# Altium PCB cuk_control_pcb_grid_connected.PcbDoc (part 2 of 2)
Units mil, origin at the board's own origin, x right, y up, seen from the top; angles counter-clockwise.
Board outline 2965 x 4860 mil, 5 copper layers (Top Layer, MIddle layer1, Signal Layer 1, MIddle Layer 2, Bottom Layer), stack 37.051 mil thick; 205 components, 129 nets, 699 pads, 80 vias.
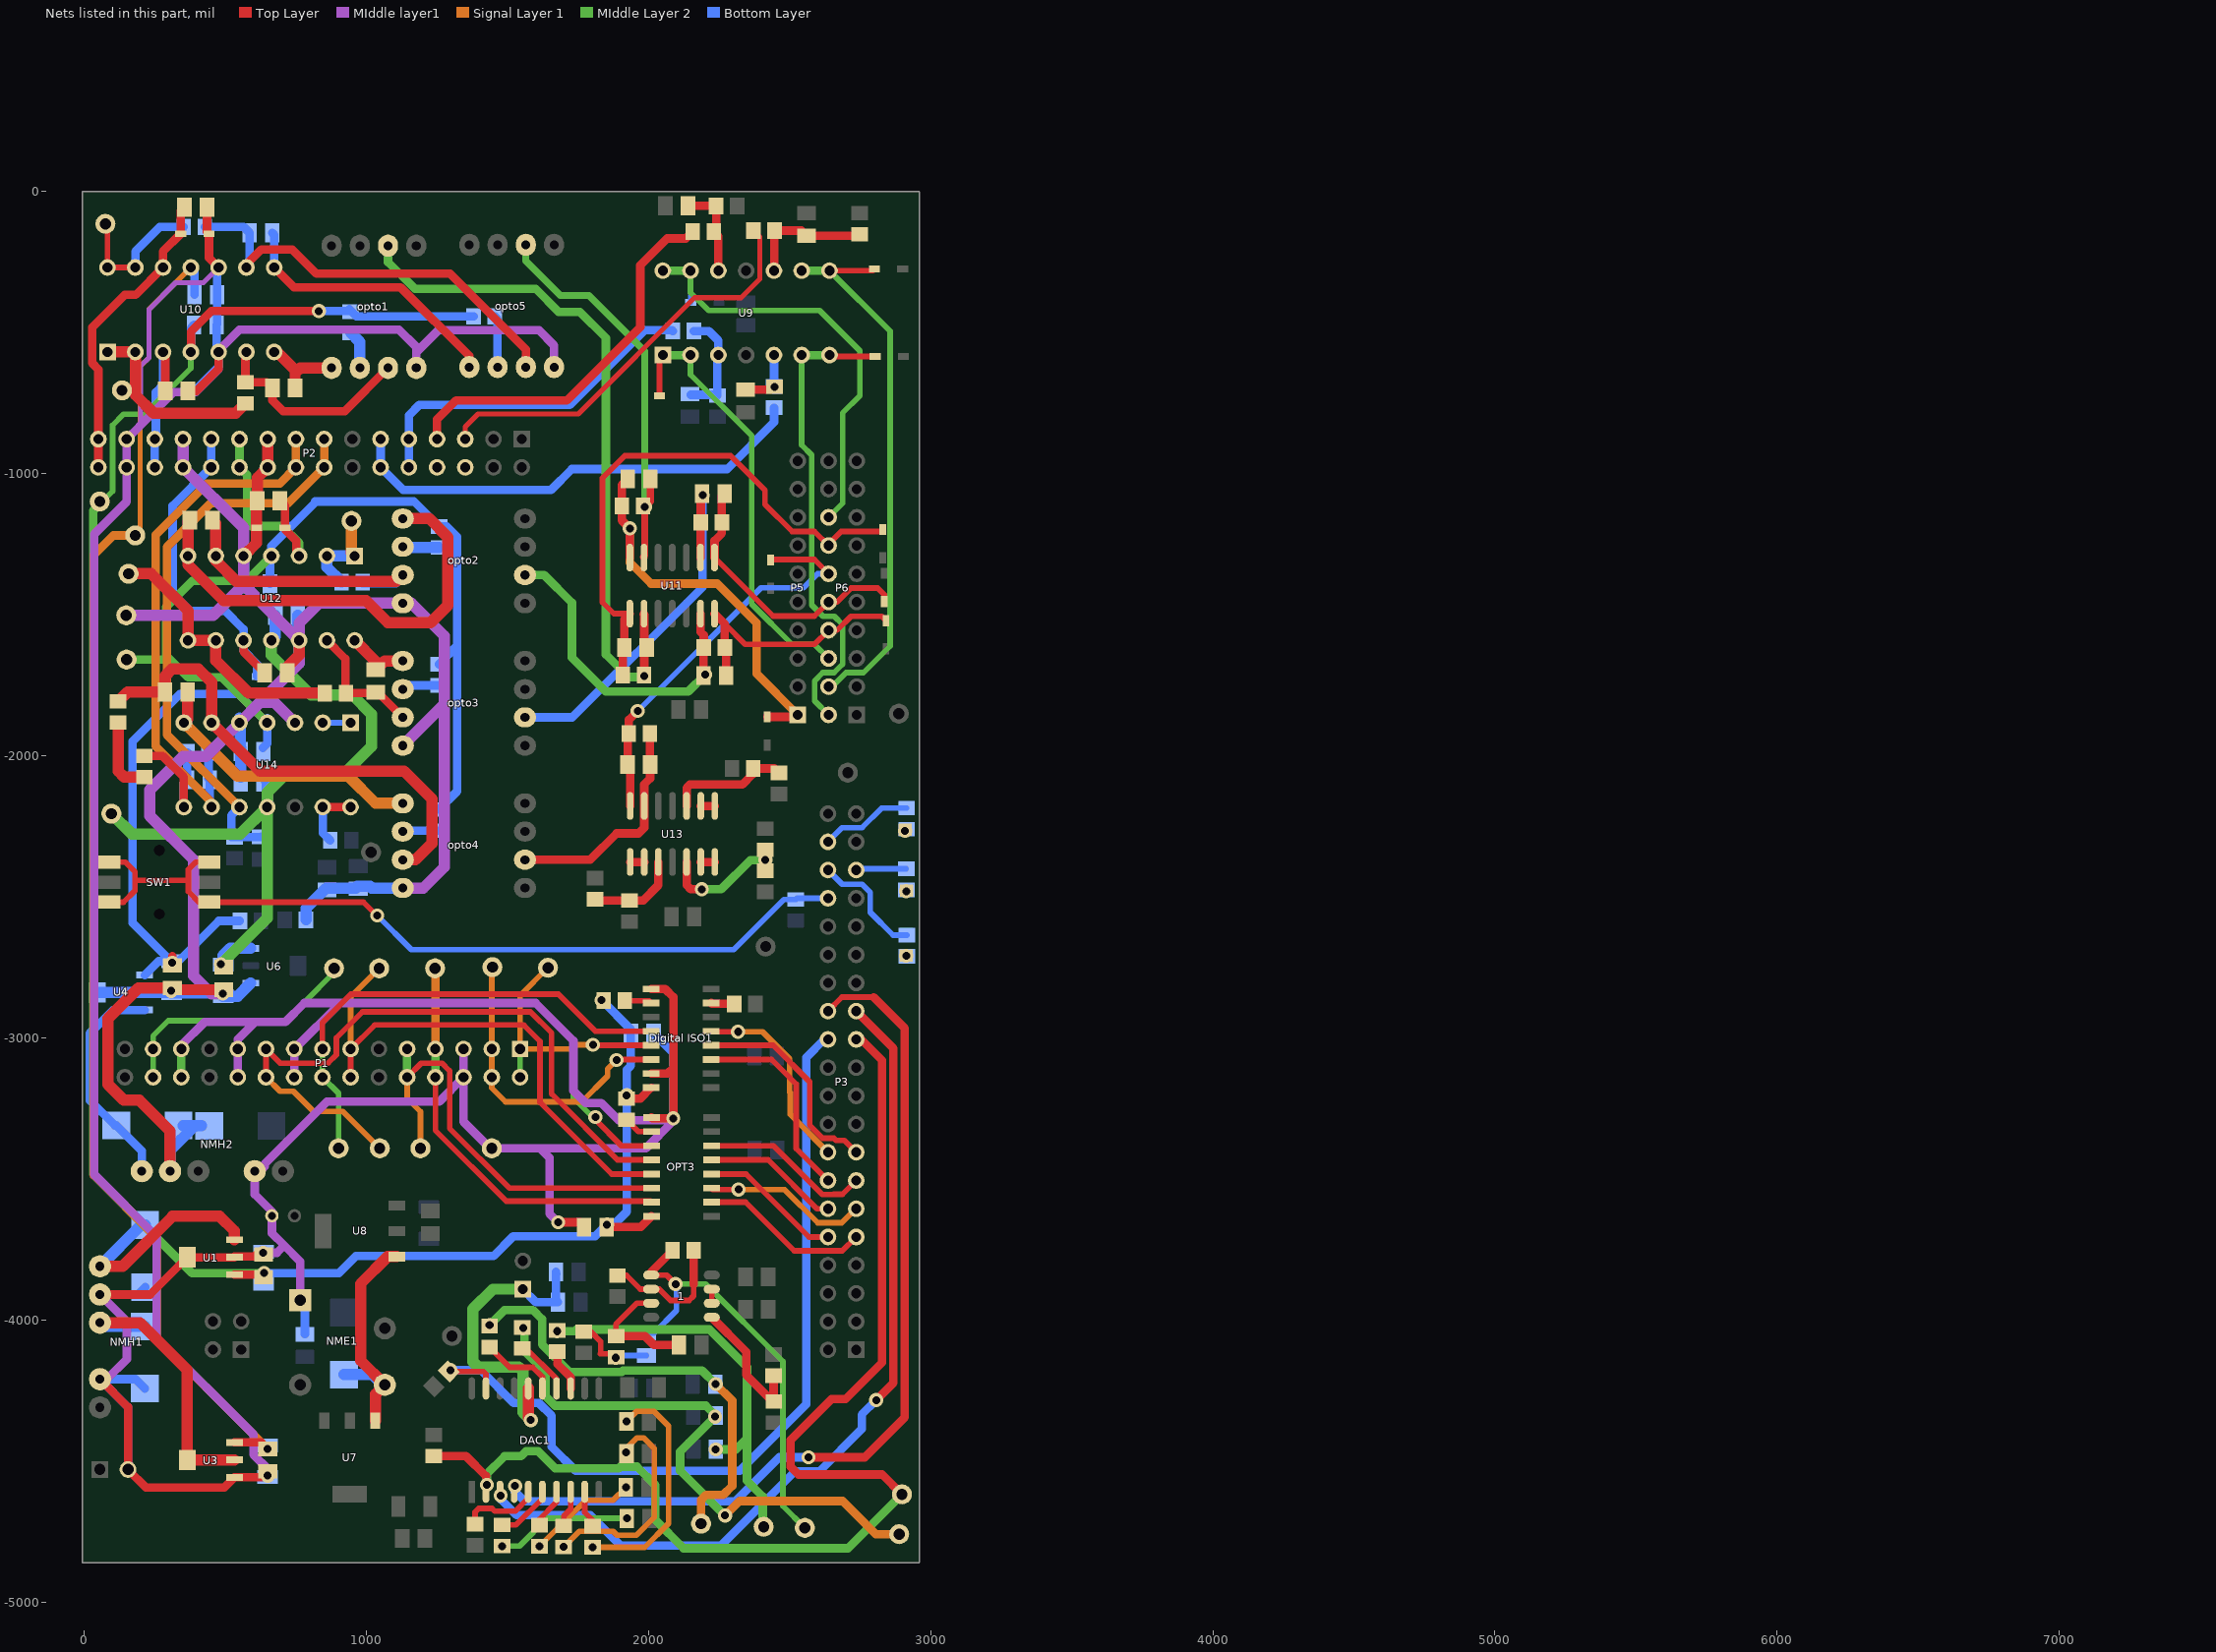
[diagram p5: the nets of this part, all layers, seen from the top]

## Via types
v1: diameter 50, hole 28, Top Layer to Bottom Layer, 80 vias

## Nets (pads, with @x,y where several pads share a name; then routed paths per layer and width w, separated by ;. In a path a pad name is that pad's centre, name@x,y a point inside that pad or via, vN(x,y) a via of type N, cw(c..) or ccw(c..) an arc to the next point about the centre after c; other vN are vias at no path point) (continued)
GND: "Digital ISO1.9" "Digital ISO1.15" C1.2 C2.2 C3.2 C4.1 C8.1 C9.2 C10.1 C15.2 C24.1 C28.2 C30.2 C39.1 C41.2 C42.1 C61.2 D5.1 D12.1 NME1.1 NMH1.2 NMH1.5 NMH2.2 OPT3.9 opto1.4 opto5.4 P1.5 P1.6 P1.17 P1.18 P1.21 P1.22 P1.25 P1.26 P2.29 P2.30 TP3.1 U1.2 U3.1 U10.5 U10.10 | length 17081.4
  Top Layer w30: NMH1.2@58,-4209 157,-4308 C2.2@157,-4529 221,-4593 498.13,-4593 U3.1@534.32,-4556.81 631.19,-4556.81 C9.2@652,-4536 ; NMH1.5@58,-3909 235,-3909 U1.2@367,-3777 U1.2@534.32,-3777 534.32,-3774.41 605.59,-3774.41 619,-3761 v1(636,-3761) ; C41.2@369,-707 400,-707 478.28,-628.72 U10.5@478.28,-569 ; C61.2@437,-56 437,-143 D12.1@444,-150 444,-235.51 U10.10@478.28,-269.79 ; v1(1681,-3653) 1756,-3653 C28.2@1773,-3670 ; 2010.7,-3126 2069,-3126 2089,-3106 ; 2010.7,-2826 2060,-2826 2089,-2855 2089,-3106 ; OPT3.9@2011.7,-3282 2014.7,-3285 v1(2089,-3285) 2089,-3106
  MIddle layer1 w18: 198,-832 202.47,-827.53 202.47,-617.53 203.1,-617.53 231.53,-589.1 231.53,-418.47 326,-324 424.06,-324 U10.10@478.28,-269.79
  MIddle layer1 w30: NMH1.5@58,-3909 153,-4004 153,-4138 82,-4209 NMH1.2@58,-4209 157,-4308 C2.2@157,-4529 ; 198,-832 P2.29@152,-878 P2.30@152,-978 152,-1100 37,-1215 37,-3483 258,-3704 258,-4061 602,-4405 602,-4476.71 652,-4526.71 v1(652,-4551) ; 202.47,-827.53 319,-711 397,-711 478.28,-629.72 U10.5@478.28,-569 478.28,-563.72 552,-490 1117,-490 1178.43,-551.43 1178.43,-570.57 ; P1.25@346,-3039 346,-3026 429,-2943 608,-2943 ; P1.22@546,-3139 P1.21@546,-3039 546,-3005 608,-2943 ; v1(636,-3761) 684.76,-3761 710.38,-3735.38 ; P1.18@746,-3139 P1.17@746,-3039 909,-2876 ; NME1.1@767,-3929 767,-3792 710.38,-3735.38 ; opto1.4@1178.43,-625.54 1178.43,-570.57 ; P1.5@1346,-3039 P1.6@1346,-3139 ; opto5.4@1666.43,-622.54 1666.43,-545.43 1613,-492 1257,-492 1178.43,-570.57 ; v1(1681,-3653) 1651,-3623 1651,-3425 1617,-3391 ; 608,-2943 715,-2943 782,-2876 909,-2876 ; 710.38,-3735.38 667,-3692 C15.2@667,-3630 667,-3615 606,-3554 NMH2.2@606,-3472 624,-3472 641.63,-3454.37 641.63,-3445.34 861.97,-3225 1260,-3225 P1.6@1346,-3139 ; 909,-2876 1601,-2876 1735,-3010 1735,-3187 1778,-3230 1833.71,-3230 1895,-3291.29 2082.71,-3291.29 v1(2089,-3285) 2089,-3294 1992,-3391 1617,-3391 ; P1.6@1346,-3139 1346,-3297 1440,-3391 TP3.1@1446,-3391 1617,-3391
  MIddle Layer 2 w30: P1.26@346,-3139 P1.25@346,-3039
  Bottom Layer w30: NMH1.2@58,-4209 184,-4209 C10.1@217,-4242 ; NMH1.5@58,-3909 192,-3909 C1.2@218,-3883 ; D5.1@371,-708 392,-708 478.28,-621.72 U10.5@478.28,-569 471,-561.72 C39.1@471,-473 473,-471 C42.1@473,-366 473,-275.06 U10.10@478.28,-269.79 ; NME1.1@767,-3937 784,-3954 C24.1@784,-4050 ; C30.2@2019,-2983 2089,-3053 v1(2089,-3285)
GND_S: C11.2 C12.2 C13.1 C18.1 C19.2 C20.1 C45.1 C47.2 C48.1 C51.2 C55.1 C60.1 C63.2 C64.2 D7.1 D9.1 NMH2.5 opto2.4 opto3.4 opto4.4 P2.19 P2.20 P2.25 P2.26 R4.1 TP21.1 U4.2 U6.1 U12.5 U12.12 U14.3 U14.5 | length 8555.9
  Top Layer w40: NMH2.5@306,-3472 306,-3329 197,-3220 142.29,-3220 86.47,-3164.18 86.47,-2930.53 194,-2823 C13.1@314,-2823 320,-2829 C19.2@496,-2829 ; U12.5@566.57,-1291.79 613,-1245.36 D7.1@613,-1192 613,-1098 C47.2@615,-1096 615,-1015 P2.20@652,-978 P2.19@652,-878 ; C51.2@721,-1706 721,-1685 763.43,-1642.57 U12.12@763.43,-1591
  MIddle layer1 w40: TP21.1@151,-1502 459.15,-1502 566.57,-1394.57 ; P2.25@352,-878 P2.26@352,-978 566.57,-1192.57 U12.5@566.57,-1291.79 566.57,-1394.57 ; v1(493,-2843) 453,-2843 390,-2780 390,-2369 234,-2213 234,-2121 353,-2002 432.51,-2002 U14.5@551.72,-1882.79 624.26,-1810.26 ; U14.3@748.57,-1882.79 676.04,-1810.26 624.26,-1810.26 ; opto4.4@1130.46,-2468.43 1203.57,-2468.43 1277,-2395 1277,-1817.39 ; opto3.4@1130.46,-1963.93 1277,-1817.39 ; 566.57,-1394.57 763,-1591 U12.12@763.43,-1591 ; 624.26,-1810.26 763.43,-1671.09 U12.12@763.43,-1591 ; U12.12@763.43,-1591 763.43,-1529.57 833.57,-1459.43 opto2.4@1130.46,-1459.43 1161.43,-1459.43 1277,-1575 1277,-1817.39
  Bottom Layer w40: U4.2@49,-2839 U4.2@216.32,-2839 309.9,-2839 C12.2@311,-2840.1 482,-2840.1 C18.1@494,-2852.1 545.39,-2852.1 U6.1@591.68,-2805.81 ; NMH2.5@306,-3472 306,-3399 393.17,-3311.83 ; C20.1@418,-3310 395,-3310 ; U14.5@552.15,-1865.79 555,-1868.64 555,-1972 556,-1973 C60.1@556,-2075 ; U12.5@566.57,-1291.79 566.57,-1377.57 C45.1@580,-1391 ; D9.1@715,-1719 763.43,-1670.57 U12.12@763.43,-1591 759,-1586.57 C48.1@759,-1502 ; R4.1@787.4,-2581 787.4,-2540.6 859.57,-2468.43 963.79,-2468.43 969.22,-2463 1014.78,-2463 1020.21,-2468.43 opto4.4@1130.46,-2468.43 ; 393.17,-3311.83 395,-3310 ; 393.17,-3311.83 353,-3310 395,-3310 ; 393.17,-3311.83 397,-3312 395,-3310
  other v1: 310,-2833
LED1: P3.35 R6.1 | length 178.8
  Bottom Layer w20: P3.35@2737,-2405 2741.4,-2400.6 R6.1@2914,-2400.6
LED2: P3.36 R7.1 | length 415.9
  Bottom Layer w20: P3.36@2637,-2405 2687.47,-2455.47 2757.52,-2455.47 2786.53,-2484.49 2786.53,-2554.53 2867.6,-2635.6 R7.1@2916.4,-2635.6
LED3: P3.38 R8.1 | length 327.9
  Bottom Layer w20: P3.38@2637,-2305 2687.47,-2254.53 2757.52,-2254.53 2826.44,-2185.6 R8.1@2915.4,-2185.6
Net1_1: 1.1 ATEST.1 Cd.1 R41.2 | length 1567.9
  Top Layer w20: 1.1@2010.72,-3840 2065,-3840 v1(2097,-3872)
  Top Layer w30: 1.1@2010.72,-3840 2010.72,-3828.69 R41.2@2086.6,-3752.81
  MIddle Layer 2 w20: v1(2097,-3872) 2203,-3872 2477,-4146 2477,-4658 ATEST.1@2555,-4736
  Bottom Layer w20: Cd.1@1994,-4045 2021,-4045 2100,-3966 2100,-3875 v1(2097,-3872)
Net1_2: 1.2 R41.1 R47.2 | length 474.6
  Top Layer w20: R47.2@1891,-3841.6 1923.6,-3841.6 1972,-3890 1.2@2010.72,-3890 2039,-3890 2079,-3930 2145,-3930 2161.4,-3913.6 2161.4,-3872.6
  Top Layer w30: 2161.4,-3872.6 R41.1@2161.4,-3752.81
Net1_3: 1.3 Cd2.1 R50.2 | length 434
  Top Layer w20: R50.2@1886,-4056.6 1886,-4014 1960,-3940 1.3@2010.72,-3940
  Top Layer w30: R50.2@1886,-4056.6 1988.6,-4056.6 2020,-4088 Cd2.1@2109,-4088
Net1_5: 1.5 3.3k.1 R51.2 | length 484.2
  Top Layer w30: 1.5@2225.28,-3990 2347,-4111.72 2347,-4194 2441.6,-4288.6 R51.2@2445,-4288.6 2444.07,-4287.67 3.3k.1@2444.07,-4196.4
Net1_6: 1.6 1.7 | length 50
  Top Layer w20: 1.6@2225.28,-3940 1.7@2225.28,-3890
NetB_1: B.1 C72.1 R43.2 | length 1448.2
  MIddle Layer 2 w30: v1(1677,-4039) 1741,-4039 1747,-4033 2217,-4033 2350,-4166 2350,-4419 ; v1(2239,-4458) 2311,-4458 2350,-4419 ; B.1@2409,-4732 2406,-4729 2406,-4625 2350,-4569 2350,-4419
NetC1_1: C1.1 NMH1.6 U1.3 | length 822.7
  Top Layer w40: NMH1.6@58,-3809 138,-3809 315,-3632 482,-3632 534.32,-3684.32 U1.3@534.32,-3715.19
  Bottom Layer w40: NMH1.6@58,-3809 204,-3663 C1.1@218,-3663
NetC10_2: C10.2 NMH1.4 U3.4 | length 1028.9
  Top Layer w40: NMH1.4@58,-4009 200,-4009 367,-4176 U3.4@367,-4495 U3.4@534.32,-4495
  Bottom Layer w40: NMH1.4@58,-4009 71,-4022 C10.2@217,-4022
NetC11_1: C11.1 NMH2.6 U4.3 | length 796.5
  Bottom Layer w30: NMH2.6@206,-3472 206,-3400 C11.1@116,-3310 111,-3310 22,-3221 22,-2983 104.19,-2900.81 U4.3@216.32,-2900.81
NetC23_1: C23.1 NME1.5 U7.1 U8.1 | length 865.7
  Top Layer w40: U7.1@1033.55,-4356 1033.55,-4262.45 NME1.5@1067,-4229 981,-4143 981,-3871 1077.45,-3774.55 U8.1@1109,-3774.55
  Bottom Layer w40: C23.1@922,-4193 1023,-4193 NME1.5@1067,-4237
NetC34_2: C34.2 R9.1 R11.2 U9.3 | length 393.1
  Bottom Layer w20: R11.2@2242.4,-721 R11.2@2245,-723.6
  Bottom Layer w30: C34.2@2150,-721 R11.2@2242.4,-721 ; R9.1@2162,-495 2215,-495 2248.57,-528.57 U9.3@2248.57,-580 2245,-583.57 R11.2@2245,-723.6
NetC35_2: C35.2 R10.1 R12.2 U9.5 | length 219.6
  Top Layer w30: C35.2@2345,-703 2436.6,-703 v1(2447,-692.6)
  Bottom Layer w30: U9.5@2445.43,-580 2446,-580.57 R10.1@2446,-691.6 v1(2447,-692.6)
NetC36_2: C36.2 R13.1 R15.2 U9.10 | length 453.6
  Top Layer w30: U9.10@2445.43,-280.79 2447.4,-278.81 R13.1@2447.4,-139 2543,-139 C36.2@2561,-157 2744.4,-157 R15.2@2749,-152.4
NetC37_2: C37.2 R14.1 R16.2 U9.12 | length 338.9
  Top Layer w30: C37.2@2141,-51 2239.6,-51 R16.2@2240.6,-52 2240.6,-134.8 R14.1@2232.4,-143 2248.57,-159.17 U9.12@2248.57,-280.79
NetC38_1: C38.1 opto1.6 R17.1 U11.2 | length 2471
  Top Layer w30: U11.2@1985,-1496.41 1983,-1498.41 1986,-1501.41 v1(1986,-1718)
  MIddle Layer 2 w30: opto1.6@1078.43,-192.46 1078.43,-250.43 1173,-345 1601,-345 1683,-427 1758,-427 1850,-519 1850,-1641 1930,-1721 1973,-1721 1986,-1708 v1(1986,-1718)
NetC38_2: C38.2 D6.2 P6.14 R17.2 U11.1 | length 1994.7
  Top Layer w20: U11.1@1935,-1496.41 1878.41,-1496.41 1838,-1456 1838,-1016 1917,-937 2292,-937 2414,-1059 2414,-1109.04 2509.96,-1205 2589,-1205 P6.14@2639,-1255 2639,-1250 2684,-1205 2824,-1205 D6.2@2831,-1198
  Top Layer w30: R17.2@1910.6,-1714 1910.6,-1620.4 C38.2@1915,-1616 1915,-1516.41 U11.1@1935,-1496.41
NetC40_1: C40.1 opto1.3 R18.2 U10.6 | length 746.3
  Top Layer w30: U10.6@576.7,-569 573,-572.7 R18.2@573,-676.6 648.6,-676.6 C40.1@669,-697 669,-741 707,-779 924.96,-779 opto1.3@1078.43,-625.54
NetC40_2: C40.2 opto1.1 U10.7 | length 301.5
  Top Layer w40: U10.7@675.13,-569 685,-569 749,-633 749,-644 ; C40.2@749,-697 749,-644 ; opto1.1@878.43,-625.54 767.46,-625.54 749,-644
NetC41_1: C41.1 D5.2 P2.27 P2.28 U10.3 | length 562.3
  Top Layer w30: U10.3@281.43,-569 289,-576.57 C41.1@289,-707
  Bottom Layer w30: P2.28@252,-978 P2.27@252,-878 256,-874 256,-712 281.43,-686.57 U10.3@281.43,-569
NetC43_1: C43.1 opto2.3 R21.2 U12.6 | length 1003.3
  Top Layer w40: C43.1@456,-1165 468.15,-1177.15 U12.6@468.15,-1291.79 468.15,-1309.15 541,-1382 1107.89,-1382 opto2.3@1130.46,-1359.43
  Bottom Layer w40: R21.2@988.4,-1384 1105.89,-1384 opto2.3@1130.46,-1359.43
NetC43_2: C43.2 opto2.1 U12.7 | length 1620.2
  Top Layer w40: C43.2@376,-1165 369.72,-1171.28 U12.7@369.72,-1291.79 369.72,-1323.72 496,-1450 1000,-1450 1078,-1528 1229,-1528 1290,-1467 1290,-1225 1224.43,-1159.43 opto2.1@1130.46,-1159.43
NetC44_1: C44.1 opto2.6 R20.1 U11.6 | length 1168.5
  Top Layer w30: U11.6@2185,-1496.41 2185,-1561 2196.6,-1572.6 R20.1@2196.6,-1616 2196,-1616.6 C44.1@2196,-1712
  MIddle Layer 2 w30: opto2.6@1563.54,-1359.43 1631.43,-1359.43 1730,-1458 1730,-1652 1850,-1772 2142,-1772 v1(2202,-1712)
NetC44_2: C44.2 D8.2 P6.8 R20.2 U11.7 | length 884.7
  Top Layer w20: 2271.4,-1532.81 2343.59,-1605 2589,-1605 P6.8@2639,-1555 2668.96,-1555 2718.48,-1505.47 2759.52,-1505.47 2760.04,-1506 2827,-1506 D8.2@2842,-1521
  Top Layer w30: U11.7@2235,-1496.41 2271.4,-1532.81 R20.2@2271.4,-1616 2276,-1620.6 C44.2@2276,-1716
NetC47_1: C47.1 D7.2 P2.21 P2.22 U12.3 | length 798.1
  Top Layer w30: C47.1@695,-1096 713,-1114 D7.2@713,-1192 713,-1198 753,-1238 753,-1281.36 U12.3@763.43,-1291.79
  MIddle Layer 2 w30: P2.21@552,-878 P2.22@552,-978 579,-1005 579,-1186 703,-1186 763.43,-1246.43 U12.3@763.43,-1291.79
NetC49_1: C49.1 opto3.3 R23.2 U12.13 | length 454.1
  Top Layer w30: U12.13@861.85,-1591 927,-1656.15 927,-1775.6 R23.2@929.4,-1778 1032,-1778 C49.1@1035,-1775 1041.54,-1775 opto3.3@1130.46,-1863.93
NetC49_2: C49.2 opto3.1 U12.14 | length 243.3
  Top Layer w40: U12.14@960.28,-1591 1035,-1665.72 C49.2@1035,-1695 1066.07,-1663.93 opto3.1@1130.46,-1663.93
NetC50_1: C50.1 opto3.6 R24.1 U11.9 | length 1366.9
  Top Layer w30: U11.9@2185,-1297.59 2185,-1174.2 R24.1@2186.2,-1173 C50.1@2186.2,-1077
  Bottom Layer w30: opto3.6@1563.54,-1863.93 1731.07,-1863.93 2193,-1402 v1(2193,-1077)
NetC50_2: C50.2 D10.2 P6.10 R24.2 U11.8 | length 1003.4
  Top Layer w20: U11.8@2235,-1297.59 2442.41,-1505 2589,-1505 P6.10@2639,-1455 2669,-1455 2689.47,-1434.53 ; 2689.47,-1434.48 2718.48,-1405.47 2812.47,-1405.47 2836,-1429 D10.2@2836,-1453
  Top Layer w30: U11.8@2235,-1297.59 2235,-1238 2261,-1212 R24.2@2261,-1173 2261,-1081 C50.2@2271,-1071
NetC51_1: C51.1 D9.2 P2.23 P2.24 U12.10 | length 1239.9
  Top Layer w30: U12.10@566.57,-1591 566.57,-1631.57 C51.1@641,-1706
  Bottom Layer w30: P2.23@452,-878 P2.24@452,-978 315.2,-1114.8 315.2,-1423.2 378,-1486 501,-1486 566.5,-1551.5 566.57,-1551.43 U12.10@566.57,-1591 566.57,-1627.57 615,-1676 D9.2@615,-1719
NetC52_1: C52.1 P2.17 P2.18 R27.2 U14.9 | length 1924.8
  Signal Layer 1 w30: U14.9@453.72,-2165 255,-1966.28 255,-1217 437,-1035 695,-1035 P2.18@752,-978 P2.17@752,-878
  Bottom Layer w30: R27.2@442.4,-1988 442.4,-2080.4 C52.1@447,-2085 447,-2175.7 U14.9@453.3,-2182
NetC52_2: C52.2 R27.1 R30.2 U14.8 | length 476.5
  Top Layer w30: R30.2@215,-2000.6 279.6,-2000.6 354.87,-2075.87 U14.8@354.87,-2182
  Bottom Layer w30: U14.8@354.87,-2182 354.87,-2097.13 C52.2@367,-2085 367,-1988.6 R27.1@367.6,-1988
NetC53_1: C53.1 opto4.6 R26.1 U13.13 | length 811.4
  Top Layer w30: opto4.6@1563.54,-2368.43 1794.57,-2368.43 1888,-2275 1966,-2275 1986,-2255 U13.13@1986,-2177.59 1986,-2101 2007,-2080 C53.1@2007,-2031 2006.4,-2030.4 R26.1@2006.4,-1922
NetC53_2: C53.2 D11.2 P6.12 R26.2 U13.14 | length 1463
  Top Layer w20: D11.2@2435,-1299 2435,-1304.53 2588.53,-1304.53 P6.12@2639,-1355
  Top Layer w30: U13.14@1936,-2177.59 1936,-2040 C53.2@1927,-2031 1927,-1926.6 R26.2@1931.6,-1922 1931.6,-1872.4 v1(1963,-1841)
  Bottom Layer w20: v1(1963,-1841) 2399.47,-1404.53 2550.52,-1404.53 2600.04,-1355 P6.12@2639,-1355
NetC54_1: C54.1 opto4.3 R28.2 U14.6 | length 1751.6
  Top Layer w40: R28.2@122,-1807.6 155.6,-1774 C54.1@288,-1774 288,-1718 313,-1693 407,-1693 453.3,-1739.3 U14.6@453.3,-1882.79 624.51,-2054 1135,-2054 1234,-2153 1234,-2310 1175.57,-2368.43 opto4.3@1130.46,-2368.43
NetC54_2: C54.2 opto4.1 U14.7 | length 1008.1
  Top Layer w40: U14.7@354.87,-1882.79 368,-1869.66 C54.2@368,-1774
  Signal Layer 1 w40: U14.7@354.87,-1882.79 544.09,-2072 938,-2072 1034.43,-2168.43 opto4.1@1130.46,-2168.43
NetC57_1: C57.1 P2.15 P2.16 R31.2 U14.10 | length 2028.3
  Signal Layer 1 w30: U14.10@551.72,-2182 295,-1925.28 295,-1260 450,-1105 725,-1105 P2.16@852,-978 P2.15@852,-878
  Bottom Layer w30: U14.10@551.72,-2182 523,-2210.72 523,-2288.6 R31.2@535,-2288.6 628.4,-2288.6 C57.1@630,-2287
NetC58_1: C58.1 opto5.6 R32.1 U11.13 | length 1452.1
  Top Layer w25: U11.13@1985,-1297.59 1983,-1295.59 1988,-1290.59 v1(1988,-1118) 2008,-1098 C58.1@2008,-1019
  MIddle Layer 2 w25: opto5.6@1566.43,-189.46 1566.43,-246.43 1689,-369 1790,-369 1988,-567 v1(1988,-1118)
NetC58_2: C58.2 D13.2 P5.1 R32.2 U11.14 | length 1454.9
  Top Layer w30: C58.2@1928,-1019 1907,-1040 R32.2@1907,-1114 1907,-1166 v1(1935,-1194) U11.14@1935,-1297.59 ; D13.2@2422,-1862 2523,-1862 P5.1@2530,-1855
  Signal Layer 1 w30: v1(1935,-1194) 1935,-1315 2010,-1390 2245,-1390 2384,-1529 2384,-1709 P5.1@2530,-1855
NetC59_1: C59.1 opto5.3 R33.2 U10.9 | length 1527.1
  Top Layer w30: U10.9@576.7,-269.79 576.7,-258.3 629,-206 739,-206 825,-292 1299,-292 1566.43,-559.43 opto5.3@1566.43,-622.54
  Bottom Layer w30: R33.2@429.4,-126 567,-126 C59.1@588,-147 588,-258.49 U10.9@576.7,-269.79
NetC59_2: C59.2 opto5.1 U10.8 | length 986.1
  Top Layer w30: U10.8@675.13,-269.79 745.34,-340 1123,-340 1366.43,-583.43 opto5.1@1366.43,-622.54
  Bottom Layer w30: C59.2@668,-147 675.13,-154.13 U10.8@675.13,-269.79
NetC61_1: C61.1 D12.2 P2.31 P2.32 U10.12 | length 1089.5
  Top Layer w30: P2.32@52,-978 P2.31@52,-878 52,-630.84 30.05,-608.88 30.05,-481.95 145,-367 184.21,-367 U10.12@281.43,-269.79 281.43,-212.57 D12.2@344,-150 344,-69 C61.1@357,-56
NetC67_1: C67.1 D.1 R39.2 | length 1589.5
  MIddle Layer 2 w30: v1(1438,-4017) 1491,-3964 1592,-3964 1624,-3996 1624,-4086 1721,-4183 1905.71,-4183 1910.71,-4178 2191,-4178 v1(2239,-4226)
  Signal Layer 1 w30: D.1@2187,-4721 2187,-4637 2205,-4619 2266,-4619 2298,-4587 2298,-4285 v1(2239,-4226)
NetC68_1: C68.1 C69.1 DAC1.16 P7.1 | length 1146.8
  Top Layer w40: DAC1.16@1575.13,-4241.86 1575.13,-4345.13 v1(1584,-4354)
  MIddle Layer 2 w40: P7.1@1556,-3890 1450,-3890 1379,-3961 1379,-4147 1398,-4166 1541,-4166 1556,-4181 1556,-4326 v1(1584,-4354)
  Bottom Layer w20: C68.1@1673,-3829 C68.1@1680,-3836
  Bottom Layer w30: P7.1@1556,-3890 1602,-3936 C69.1@1680,-3936 1673,-3929 C68.1@1673,-3829
NetC71_1: C71.1 R38.1 | length 483.8
  MIddle Layer 2 w20: v1(1482,-4800.4) 1544.6,-4800.4 1643,-4702 v1(1925,-4702)
NetC73_1: C73.1 R40.1 | length 392.7
  Signal Layer 1 w20: v1(1615,-4801.4) 1778.4,-4638 1875,-4638 v1(1921,-4592)
NetC74_1: C74.1 R42.2 | length 764.7
  Signal Layer 1 w20: v1(1701,-4803.4) 1756.4,-4748 1875,-4748 1889,-4762 1958,-4762 2022,-4698 2022,-4455 1984,-4417 1960,-4417 1922,-4455 v1(1922,-4469)
NetC75_1: C75.1 R44.2 | length 834.4
  Signal Layer 1 w20: v1(1803,-4804.4) 1987.6,-4804.4 2072,-4720 2072,-4375 2020,-4323 1959,-4323 v1(1923,-4359)
NetCc_1: Cc.1 CTESTIN.1 Rc.2 | length 2062.3
  MIddle Layer 2 w30: v1(1557,-4028) 1562,-4033 1562,-4109 1637,-4184 1637,-4270 1670,-4303 2204,-4303 2237,-4336 v1(2237,-4342) 2113,-4466 2113,-4533 v1(2272,-4692)
  Signal Layer 1 w30: v1(2272,-4692) 2323,-4641 2689,-4641 2806,-4758 CTESTIN.1@2889,-4758
NetCd_2: Cd.2 R49.2 R50.1 | length 295.8
  Top Layer w20: R49.2@1771,-4040.6 1796.6,-4040.6 1832,-4076 1832,-4117 1830,-4119 1873.6,-4119 R50.1@1886,-4131.4 R50.1@1886,-4128.53
  Bottom Layer w20: v1(1885,-4133) 1893,-4125 Cd.2@1994,-4125
NetD1_2: D1.2 P6.6 U9.1 U9.2 | length 1571.1
  Top Layer w20: D1.2@2040,-724 2040,-591.72 U9.1@2051.72,-580
  MIddle Layer 2 w20: U9.2@2150.15,-580 2150.15,-649.15 2367,-866 2367,-1462.04 2510.43,-1605.47 2589.47,-1605.47 P6.6@2639,-1655
  MIddle Layer 2 w30: U9.1@2051.72,-580 U9.2@2150.15,-580
NetD2_2: D2.2 P6.2 U9.6 U9.7 | length 1713.7
  Top Layer w20: U9.7@2642.28,-580 2647.28,-585 D2.2@2804,-585
  MIddle Layer 2 w20: U9.6@2543.85,-580 2543.85,-898.81 2579.53,-934.48 2579.53,-1465.57 2619.43,-1505.47 2659.52,-1505.47 2688.53,-1534.49 2688.53,-1675.51 2658.57,-1705.47 2618.48,-1705.47 2589.47,-1734.49 2589.47,-1805.47 P6.2@2639,-1855 P6.2@2639,-1847
  MIddle Layer 2 w30: U9.6@2543.85,-580 U9.7@2642.28,-580
NetD3_2: D3.2 P6.4 U9.8 U9.9 | length 1956.3
  Top Layer w20: U9.8@2642.28,-280.79 2795.21,-280.79 D3.2@2801,-275
  MIddle Layer 2 w20: P6.4@2639,-1755 2651.47,-1755 2701,-1705.47 2762.53,-1705.47 2857,-1611 2857,-495.51 U9.8@2642.28,-280.79
  MIddle Layer 2 w30: U9.9@2543.85,-280.79 U9.8@2642.28,-280.79
NetD4_2: D4.2 P6.16 U9.13 U9.14 | length 1609.9
  MIddle Layer 2 w20: U9.13@2150.15,-280.79 2150.15,-358.15 2214,-422 2607,-422 2750,-565 2750,-724 2688.53,-785.47 2688.53,-1105.47 P6.16@2639,-1155
  MIddle Layer 2 w30: U9.14@2051.72,-280.79 U9.13@2150.15,-280.79
  Bottom Layer w20: U9.13@2150.15,-280.79 2151,-281.64 D4.2@2151,-393
NetDAC1_2: DAC1.2 P3.23 R1.1 TP26.1 | length 4225.5
  Top Layer w30: R1.1@1240,-4481.4 1354.4,-4481.4 1425.13,-4552.13 ; P3.23@2737,-3005 2754,-3005 2829,-3080 2829,-4150 2699,-4280 2649,-4280 2504,-4425 2504,-4519 2532,-4547 2829,-4547 TP26.1@2899,-4617
  MIddle Layer 2 w30: v1(1428.32,-4583.41) 1428.32,-4551.32 1425,-4548 1491,-4482 1549.71,-4482 1567.71,-4464 1609.71,-4464 1670.71,-4525 1895.29,-4525 1901.29,-4519 1960,-4519 2025,-4584 2025,-4708 2125,-4808 2708,-4808 TP26.1@2899,-4617
  Bottom Layer w30: v1@1425,-4586.73 v1(1428.32,-4583.41)
NetDAC1_4: DAC1.4 P3.26 | length 3255.7
  Top Layer w20: P3.26@2637,-2905 2686.53,-2855.47 2798.47,-2855.47
  Top Layer w30: v1(2568,-4486) 2767,-4486 2909,-4344 2909,-2966 2798.47,-2855.47
  Bottom Layer w30: v1(1528.32,-4587.47) 1528.32,-4604.68 1527,-4606 1563,-4642 2308,-4642 2464,-4486 v1(2568,-4486)
NetDAC1_5: DAC1.5 R37.2 | length 281.7
  Top Layer w20: R37.2@1387,-4722.6 1387,-4680 1399.63,-4667.37 1446.73,-4667.37 1456.36,-4677 1528.68,-4677 1575.13,-4630.55 DAC1.5@1575.13,-4608
NetDAC1_6: DAC1.6 R38.2 | length 205.8
  Top Layer w20: R38.2@1482,-4725.6 1531.4,-4725.6 1625.13,-4631.87 DAC1.6@1625.13,-4608
NetDAC1_7: DAC1.7 R40.2 | length 154.1
  Top Layer w20: R40.2@1597,-4725.6 R40.2@1597,-4715 ; R40.2@1615,-4726.6 1615,-4705 1675.13,-4644.87 DAC1.7@1675.13,-4608
NetDAC1_8: DAC1.8 R42.1 | length 130.6
  Top Layer w20: R42.1@1701,-4728.6 1701,-4694 1725.13,-4669.87 DAC1.8@1725.13,-4608
NetDAC1_9: DAC1.9 R44.1 | length 133.1
  Top Layer w20: DAC1.9@1775.13,-4608 1775.13,-4681.13 1803,-4709 R44.1@1803,-4729.6
NetDAC1_13: DAC1.13 R43.1 | length 150
  Top Layer w30: R43.1@1678,-4111.4 1678,-4155 1725.13,-4202.13 DAC1.13@1725.13,-4241.86
NetDAC1_14: DAC1.14 Rc.1 | length 192.9
  Top Layer w20: Rc.1@1563,-4095.4 1675.13,-4207.53 DAC1.14@1675.13,-4241.86
NetDAC1_15: DAC1.15 R39.1 | length 271.7
  Top Layer w20: R39.1@1438,-4095.4 1509.6,-4167 1591,-4167 1625.13,-4201.13 DAC1.15@1625.13,-4241.86
NetDAC1_19: DAC1.19 P3.24 R3.1 | length 3085.8
  Top Layer w20: R3.1@1299,-4181.55 1416.55,-4181.55 1425.13,-4190.13 DAC1.19@1425.13,-4241.86
  Bottom Layer w30: v1(1299,-4177) 1300,-4176 1406,-4176 1523,-4293 1612,-4293 1658,-4339 1658,-4449 1743,-4534 2324,-4534 2560,-4298 2560,-3069 2624,-3005 P3.24@2637,-3005
"NetDigital ISO1_3": "Digital ISO1.3" P3.14 | length 725.5
  Top Layer w20: 2223.3,-3076 2437,-3076 2524,-3163 2524,-3392 P3.14@2637,-3505
"NetDigital ISO1_4": "Digital ISO1.4" P3.15 | length 760.9
  Top Layer w20: 2223.3,-3026 2442,-3026 2572,-3156 2572,-3310.04 2617.43,-3355.47 2657.52,-3355.47 2665.04,-3363 2695,-3363 P3.15@2737,-3405
"NetDigital ISO1_5": "Digital ISO1.5" P3.16 | length 705.6
  Top Layer w20: 2223.3,-2976 2225.3,-2978 v1(2318,-2978)
  Signal Layer 1 w20: v1(2318,-2978) 2405,-2978 2501,-3074 2501,-3192.36 2503,-3194.36 2503,-3271 P3.16@2637,-3405
"NetDigital ISO1_7": "Digital ISO1.7" R45.2 | length 82.5
  Top Layer w30: 2223.3,-2876 2226.3,-2879 R45.2@2304.6,-2879
"NetDigital ISO1_10": "Digital ISO1.10" R46.1 | length 96.6
  Top Layer w20: R46.1@1917.4,-2868 2002.7,-2868 2010.7,-2876
"NetDigital ISO1_12": "Digital ISO1.12" P1.15 P1.16 TP9.1 | length 1729.4
  Top Layer w20: P1.15@846,-3039 846,-2946 947,-2845 1682,-2845 1813,-2976 2010.7,-2976
  MIddle Layer 2 w20: P1.15@846,-3039 P1.16@846,-3139 903,-3196 TP9.1@903,-3391
"NetDigital ISO1_13": "Digital ISO1.13" P1.1 P1.2 TP7.1 | length 900.7
  Top Layer w20: v1(1804,-3024) 1806,-3026 2010.7,-3026
  MIddle Layer 2 w20: P1.2@1546,-3139 P1.1@1546,-3039
  Signal Layer 1 w20: TP7.1@1645,-2751 1546,-2850 P1.1@1546,-3039 1729,-3039 1744,-3024 v1(1804,-3024)
"NetDigital ISO1_14": "Digital ISO1.14" P1.3 P1.4 TP5.1 | length 1090.6
  Top Layer w20: v1(1888,-3078) 1890,-3076 2010.7,-3076
  Signal Layer 1 w20: TP5.1@1448,-2749 1446,-2751 P1.3@1446,-3039 P1.4@1446,-3139 1446,-3177 1495,-3226 1765,-3226 1856,-3135 1856,-3110 v1(1888,-3078)
NetLED1_1: LED1.1 R6.2 | length 10
  Top Layer w20: v1(2913.98,-2480) LED1.1@2915.4,-2478.58
  Bottom Layer w20: R6.2@2906,-2480 v1(2913.98,-2480)
NetLED2_1: LED2.1 R7.2
  other v1: 2914,-2708.58
NetLED3_1: LED3.1 R8.2 | length 20.7
  Top Layer w20: LED3.1@2897,-2266 v1(2909.8,-2266)
  Bottom Layer w20: v1(2909.8,-2266) R8.2@2915.4,-2260.4
NetOPT3_2: OPT3.2 P3.9 | length 604.7
  Top Layer w20: OPT3.2@2224.3,-3582 2345,-3582 2517.53,-3754.53 2687.47,-3754.53 P3.9@2737,-3705
NetOPT3_3: OPT3.3 P3.11 | length 584
  Top Layer w20: OPT3.3@2224.3,-3532 2229.3,-3537 v1(2320,-3537)
  Signal Layer 1 w20: v1(2320,-3537) 2483,-3537 2600.53,-3654.53 2685.47,-3654.53 2735,-3605 P3.11@2737,-3605
NetOPT3_4: OPT3.4 P3.10 | length 505.1
  Top Layer w20: OPT3.4@2224.3,-3482 2347,-3482 2570,-3705 P3.10@2637,-3705
NetOPT3_5: OPT3.5 P3.12 | length 484.4
  Top Layer w20: OPT3.5@2224.3,-3432 2425,-3432 2598,-3605 P3.12@2637,-3605
NetOPT3_6: OPT3.6 P3.13 | length 604.7
  Top Layer w20: OPT3.6@2224.3,-3382 2443.96,-3382 2616.48,-3554.53 2657.52,-3554.53 2658.04,-3554 2688,-3554 P3.13@2737,-3505
NetOPT3_10: OPT3.10 R36.2 | length 106.3
  Top Layer w20: R36.2@1923,-3289.4 1965.6,-3332 OPT3.10@2011.7,-3332
NetOPT3_11: OPT3.11 P1.27 P1.28 TP2.1 | length 2460.5
  Top Layer w20: v1(1813,-3280) 1813,-3290 1905,-3382 OPT3.11@2011.7,-3382
  MIddle Layer 2 w20: P1.28@246,-3139 P1.27@246,-3039 246,-2993 300,-2939 716,-2939 781,-2874 ; TP2.1@887,-2753 887,-2768 781,-2874 ; v1(1813,-3280) 1803,-3280 1735,-3212 1735,-3010 1599,-2874 781,-2874
NetOPT3_12: OPT3.12 P1.19 P1.20 TP18.1 | length 2448.7
  Top Layer w20: P1.20@646,-3139 P1.19@646,-3039 696,-3089 866.04,-3089 895.53,-3059.51 895.53,-2999.47 988,-2907 1583,-2907 1658,-2982 1658,-3198.64 1891.36,-3432 OPT3.12@2011.7,-3432
  Signal Layer 1 w20: P1.20@646,-3139 695.53,-3188.53 742.95,-3188.53 814.43,-3260 918,-3260 TP18.1@1049,-3391
NetOPT3_13: OPT3.13 P1.13 P1.14 TP17.1 | length 1874
  Top Layer w20: P1.14@946,-3139 P1.13@946,-3039 1031,-2954 1559,-2954 1617,-3012 1617,-3228 1871,-3482 OPT3.13@2011.7,-3482
  Signal Layer 1 w20: P1.13@946,-3039 946,-2854 TP17.1@1047,-2753
NetOPT3_14: OPT3.14 P1.9 P1.10 TP14.1 | length 1572.1
  Top Layer w20: P1.10@1158,-3139 P1.10@1146,-3139 1195.53,-3089.47 1269.42,-3089.47 1296.47,-3116.53 1296.47,-3319.87 1508.61,-3532 OPT3.14@2011.7,-3532
  MIddle Layer 2 w30: P1.10@1146,-3139 P1.9@1146,-3039
  Signal Layer 1 w20: P1.10@1146,-3139 1146,-3214 1193,-3261 TP14.1@1193,-3391
NetOPT3_15: OPT3.15 P1.7 P1.8 TP13.1 | length 1445.7
  Top Layer w20: P1.8@1246,-3139 1246,-3327 1497,-3578 2007.7,-3578 OPT3.15@2011.7,-3582
  MIddle Layer 2 w30: P1.8@1246,-3139 P1.7@1246,-3039
  Signal Layer 1 w30: TP13.1@1245,-2753 1246,-2754 P1.7@1246,-3039
Netopto1_2: opto1.2 R19.2 | length 137.6
  Bottom Layer w40: R19.2@946,-501.4 978.43,-533.83 opto1.2@978.43,-625.54
Netopto2_2: opto2.2 R22.2 | length 129.8
  Bottom Layer w40: opto2.2@1130.46,-1259.43 1133.44,-1262.4 R22.2@1259,-1262.4
Netopto3_2: opto3.2 R25.2 | length 133.1
  Bottom Layer w30: opto3.2@1130.46,-1763.93 1143.99,-1750.4 R25.2@1258,-1750.4
Netopto4_2: opto4.2 R29.2 | length 128.8
  Bottom Layer w30: opto4.2@1130.46,-2268.43 1133.49,-2265.4 R29.2@1258,-2265.4
Netopto5_2: opto5.2 R34.2 | length 183.7
  Bottom Layer w30: R34.2@1456.4,-443 1466.43,-453.02 opto5.2@1466.43,-622.54
NetP2_5: P2.5 R13.2 | length 1485.3
  Top Layer w18: P2.5@1352,-878 1352,-834 1397,-789 1752,-789 2164,-377 2329,-377 2395.53,-310.47 2395.53,-161.93 R13.2@2372.6,-139
NetP2_6: P2.6
NetP2_7: P2.7 R14.2 | length 1379.3
  Top Layer w30: P2.7@1252,-878 1252,-808 1319,-741 1712,-741 1972,-481 1972,-262 2067,-167 2133.6,-167 R14.2@2157.6,-143
NetP2_8: P2.8
NetP2_9: P2.9 P2.10 R9.2 | length 1245.5
  Bottom Layer w30: P2.10@1152,-978 P2.9@1152,-878 1152,-794 1189,-757 1722,-757 1987,-492 2084.2,-492 R9.2@2087.2,-495
NetP2_11: P2.11 P2.12 R10.2 | length 1678.1
  Bottom Layer w30: P2.11@1052,-878 P2.12@1052,-978 1132,-1058 1656,-1058 1730,-984 2280,-984 2446,-818 R10.2@2446,-766.4
NetR18_1: R18.1 TP19.1 U10.1 U10.2 | length 731.2
  Top Layer w40: U10.1@84.57,-569 U10.2@183,-569 183,-699 ; TP19.1@136,-705 177,-705 183,-699 ; R18.1@573,-751.4 538.4,-786 248,-786 183,-721 183,-699
NetR21_1: R21.1 TP20.1 U12.1 U12.2 | length 340.5
  Signal Layer 1 w40: TP20.1@949,-1168 949,-1280.51 U12.1@960.28,-1291.79
  Bottom Layer w40: R21.1@913.6,-1384 861.85,-1332.25 U12.2@861.85,-1291.79 U12.1@960.28,-1291.79
NetR23_1: R23.1 TP22.1 U12.8 U12.9 | length 974.2
  Top Layer w40: TP22.1@159,-1355 239,-1355 369.72,-1485.72 U12.8@369.72,-1591 U12.9@468.15,-1591 468.15,-1662.15 584,-1778 R23.1@854.6,-1778
NetR28_1: R28.1 R30.1 | length 273.5
  Top Layer w40: R28.1@122,-1882.4 122,-2054 143.4,-2075.4 R30.1@215,-2075.4
NetR33_1: R33.1 TP23.1 U10.13 U10.14 | length 520.8
  Top Layer w20: TP23.1@77,-115 84.57,-122.57 U10.14@84.57,-269.79 U10.13@183,-269.79
  Bottom Layer w30: U10.13@183,-269.79 183,-213 270,-126 R33.1@354.6,-126
NetR35_2: R35.2 U14.13 U14.14 | length 227.4
  Top Layer w30: U14.13@847,-2182 U14.14@945.43,-2182
  Bottom Layer w30: U14.13@847,-2182 847,-2273.4 R35.2@873.6,-2300
NetRx1_1: Rx1.1 Rx2.2 U13.5 | length 409.9
  Top Layer w30: U13.5@2136,-2376.41 2136,-2458 2151,-2473 v1(2190,-2473)
  MIddle Layer 2 w30: v1(2190,-2473) 2259,-2473 2362,-2370 2414,-2370 v1(2415,-2369)
NetRx3_1: Rx3.1 Rx4.2 U13.3 | length 331.5
  Top Layer w30: Rx3.1@1811,-2508.4 1815.2,-2512.6 Rx4.2@1933,-2512.6 1982.4,-2512.6 2036,-2459 U13.3@2036,-2376.41
NetRx5_1: Rx5.1 Rx6.2 U13.10 | length 437.4
  Top Layer w30: U13.10@2136,-2177.59 2136,-2113.57 2147.57,-2102 2334,-2102 2371.4,-2064.6 Rx5.1@2371.4,-2045 2447.47,-2045 Rx6.2@2463.07,-2060.6
NetU13_1: U13.1 U13.2 | length 50
  Top Layer w30: U13.1@1936,-2376.41 U13.2@1986,-2376.41
NetU13_6: U13.6 U13.7 | length 50
  Top Layer w30: U13.6@2186,-2376.41 U13.7@2236,-2376.41
NetU13_8: U13.8 U13.9 | length 50
  Top Layer w30: U13.9@2186,-2177.59 U13.8@2236,-2177.59
NetU14_1: U14.1 U14.2 | length 98.4
  Bottom Layer w20: U14.2@847,-1882.79 U14.1@945.43,-1882.79
P5V: "Digital ISO1.16" C3.1 C4.2 C28.1 C30.1 C39.2 OPT3.16 R19.1 R34.1 R36.1 R46.2 TP1.1 U1.1 U10.4 | length 7605.9
  Top Layer w30: U10.4@379.85,-569 379.85,-497.15 453,-424 v1(833,-424) ; U1.1@534.32,-3838.81 C4.2@628.81,-3838.81 ; C28.1@1865,-3670 1973.7,-3670 OPT3.16@2011.7,-3632 ; R36.1@1924,-3214.6 1972.1,-3214.6 2010.7,-3176
  MIddle Layer 2 w20: TP1.1@57,-1108 102.47,-1062.53 102.47,-828.47 141,-789.94 217.06,-789.94 379.85,-627.15 U10.4@379.85,-569
  MIddle Layer 2 w30: TP1.1@57,-1108 34,-1131 34,-3483 384,-3833 v1(639,-3833)
  Bottom Layer w30: U10.4@379.85,-569 379.85,-484.15 C39.2@391,-473 ; v1(639,-3833) 904,-3833 964,-3773 1452,-3773 1522,-3703 1812,-3703 v1(1854,-3661) 1879,-3661 1924,-3616 v1(1924,-3203) 1924,-3112.71 1938,-3098.71 1938,-2969 v1(1835,-2866) ; v1(833,-424) 941.2,-424 941.2,-417.8 966.39,-443 R34.1@1381.6,-443
P-5V: C8.2 C9.1 C42.2 TP4.1 U3.3 U10.11 | length 4858.3
  Top Layer w30: U3.3@534.32,-4433.19 629.19,-4433.19 v1(652,-4456)
  Signal Layer 1 w18: TP4.1@183,-1219 200.53,-1201.47 200.53,-620.1 231.53,-589.1 231.53,-418.11 U10.11@379.85,-269.79
  Signal Layer 1 w30: TP4.1@183,-1219 105,-1219 36,-1288 36,-3486 258,-3708 258,-4062 v1(652,-4456)
  Bottom Layer w30: U10.11@379.85,-269.79 393,-282.94 C42.2@393,-366
S5V: C12.1 C13.2 C45.2 C55.2 R2.2 R22.1 R25.1 R29.1 TP6.1 U4.1 U12.4 U14.4 | length 5221.2
  Top Layer w30: C13.2@314,-2743 v1(314,-2733) v1@314,-2709
  MIddle Layer 2 w30: TP6.1@152,-1659 299,-1659 303,-1655 ; U14.4@650.15,-1882.79 489.36,-1722 370,-1722 303,-1655 ; U12.4@665,-1291.79 576.79,-1380 385,-1380 292,-1473 292,-1644 303,-1655
  Bottom Layer w30: U4.1@216.32,-2777.19 265.61,-2727.9 C12.1@308.9,-2727.9 ; C12.1@311,-2727.9 C12.1@308.9,-2727.9 ; R2.2@553.6,-2585 479,-2585 331,-2733 v1(314,-2733) C12.1@308.9,-2727.9 ; C55.2@635,-1972 650.57,-1956.43 U14.4@650.57,-1865.79 ; U14.4@650.15,-1882.79 548.36,-1781 341,-1781 173,-1949 173,-2592 C12.1@308.9,-2727.9 ; C45.2@660,-1391 660,-1296.79 U12.4@665,-1291.79 665,-1257 820,-1102 820,-1098.99 1170.39,-1098.99 R22.1@1259,-1187.6 1286.6,-1187.6 1323,-1224 1323,-1610.6 ; R29.1@1258,-2190.6 1323,-2125.6 1323,-1610.6 ; R25.1@1258,-1675.6 1323,-1610.6
S-5V: C18.2 C19.1 C48.2 C60.2 TP8.1 U6.3 U12.11 U14.11 | length 2676.3
  MIddle Layer 2 w40: TP8.1@98,-2205 171,-2278 554.15,-2278 U14.11@650.15,-2182 ; v1(486,-2739) 650.15,-2574.85 U14.11@650.15,-2182 ; U12.11@665,-1591 665,-1644 805,-1784 951,-1784 1020,-1853 1020,-1967 915,-2072 708,-2072 650.15,-2129.85 U14.11@650.15,-2182
  Bottom Layer w40: C18.2@494,-2739.9 494,-2708 519.81,-2682.19 U6.3@591.68,-2682.19 ; C60.2@636,-2075 650.57,-2089.57 U14.11@650.57,-2165 ; U12.11@665,-1591 679,-1577 C48.2@679,-1502
SW-1: P3.34 R5.2 SW1.1 | length 3059.4
  Top Layer w20: SW1.1@90.83,-2518.68 141.32,-2518.68 182,-2478 182,-2441 ; SW1.1@90.83,-2376.94 147.94,-2376.94 182,-2411 182,-2441 ; SW1.1@445.17,-2376.94 397.06,-2376.94 371,-2403 371,-2442 ; v1(1040,-2566) 1038.65,-2566 991.32,-2518.68 SW1.1@445.17,-2518.68 408.68,-2518.68 371,-2481 371,-2442 ; 182,-2441 370,-2441 371,-2442
  Bottom Layer w20: v1(1040,-2566) 1161,-2687 2303,-2687 2480.4,-2509.6 R5.2@2523,-2509.6 2527.6,-2505 P3.34@2637,-2505
x1: DAC1.3 P3.25 | length 3114.2
  Top Layer w30: P3.25@2737,-2905 2869,-3037 2869,-4222 v1(2808,-4283)
  Bottom Layer w30: v1(1477,-4621) 1477,-4634 1534,-4691 1795,-4691 1903,-4799 2256.53,-4799 2519.53,-4536 2606.47,-4536 2756.43,-4386.03 2756.43,-4334.57 v1(2808,-4283)
pads on no net: "Digital ISO1.6" "Digital ISO1.11" DAC1.17 NME1.17 NMH1.15 NMH2.15 OPT3.7 opto1.7 opto1.8 opto1.18 opto2.7 opto2.8 opto2.18 opto3.7 opto3.8 opto3.18 opto4.7 opto4.8 opto4.18 opto5.7 opto5.8 opto5.18 P3.1 P3.2 P3.3 P3.4 P3.5 P3.6 P3.7 P3.8 P3.17 P3.18 P3.21 P3.22 P3.27 P3.28 P3.29 P3.30 P3.31 P3.32 P3.33 P3.37 P4.1 P4.2 P4.3 P4.4 P5.2 P5.3 P5.4 P5.5 P5.6 P5.7 P5.8 P5.9 P5.10 SW1.10 SW1.NC U1.5 U3.5 U4.5 U6.5 U7.5 U8.5

## Polygon pours and split planes (outlines as drawn)
GND_S on MIddle layer1 "gnd" (solid, pour order 50): 122,-1173 127,-1173 256.02,-1039.36 1236.02,-1043.57 1239,-1048 1337,-1146 1337,-2480 1271,-2546 1268,-2551 834,-2551 542,-2843 122,-2843
GND on MIddle layer1 "gnd" (solid, pour order 48): 337,-2977 384,-2930 384,-2928 559,-2928 729.09,-2757.91 753.51,-2686 913,-2686 913,-3587 625,-3587 618,-3594 565,-3541 565,-3444 562,-3441 594,-3409 594,-3185 338,-3185 338,-3169 337,-3150
GND_S on MIddle layer1 "gnd" (solid, pour order 46): 501,-3496 470,-3527 189,-3527 75,-3413 75,-2881 122,-2832 122,-2822 245,-2822 291,-2868 244,-2915 244,-3261 501,-3261
DSPGND on MIddle layer1 "gnd" (solid, pour order 42): 818,-3655 818,-3744 844,-3770 1596.33,-3770 1603.5,-3662.5 1589.5,-3648.5
GND on MIddle layer1 "gnd" (solid, pour order 36): 2025,-2754 2096.65,-2825.65 2103,-2825.65 2103,-3533 2103,-3534 2046.98,-3592.81 866.6,-3584.25 872.7,-2687 1409,-2687 1409,-2754
DSPGND on MIddle layer1 "gnd" (solid, pour order 34): 808.66,-89.78 881,-17.45 881,-13.86 2890.12,-20.62 2939,-69.5 2939,-4801 2913,-4827 2913,-4838 2452.5,-4838 2452.5,-3763 2215.5,-3763 2164,-3711.5 2164,-2757.5 2236.5,-2685 2236.5,-1114 2245.5,-1105 1956.5,-816 1829.5,-816 1829.5,-398 1775.5,-344 846.51,-338.21 811.78,-303.24 807.5,-97
DSPGND on MIddle layer1 "gnd" (solid, pour order 30): 1077,-4292 1121.95,-4335 1121.95,-4679 1475.95,-4679 1475.95,-4835 804.95,-4835 772.95,-4803 772.95,-4322 776,-4322 806,-4292
DSPGND on MIddle layer1 "gnd" (solid, pour order 28): 1626.54,-4392.77 1623.54,-4389.77 1623.54,-4180.36 939.5,-4020.55 926.48,-3723.85 2479.89,-3740.11 2523.54,-3783.77 2508.54,-3798.77 2508.54,-4840.77 1671.54,-4840.77 1664.54,-4847.77 1652.54,-4835.77 1348.54,-4835.77 1348.54,-4690.77 1363.54,-4675.77 1618.54,-4675.77 1618.54,-4543.77 1626.54,-4535.77
DSPGND on MIddle layer1 "gnd" (solid, pour order 26): 1322,-4656.77 1585,-4656.77 1585,-4207.23 1520,-4177.77 1192,-4133 1182,-4650.77 1192,-4660.77
GND on MIddle layer1 "Middle 1-No Net" (solid, pour order 8): 23.61,-72.89 67.5,-29 89,-24 714,-24 749,-59 749,-384 752,-384 804,-436 1732,-436 1781,-485 1781,-690 1737,-734 1018,-734 928,-824 53,-824 53,-819 18,-784
DSPGND on MIddle layer1 "Middle 1-No Net" (solid, pour order 4): 1435.53,-2609.35 1437.35,-2609.35 1521,-2692.47 2300,-2692.47 2300,-1077 2031.62,-808.63 1435.53,-807.46
GND on MIddle layer1 "Middle 1-No Net" (solid, pour order 0): 18.08,-3657.55 57.84,-3617.78 59.24,-3617.78 724.52,-3617.78 889.24,-4027.83 889.24,-4120.78 724.24,-4285.78 724.24,-4760.55 673,-4811.78 101.11,-4811.78 18.08,-4725.97

## Silkscreen, mask and mechanical layers (free items; w line width, h text height)
Mechanical 1:
  lines w10: -4,-4679 -4,-4853 726,-4853 2959,-4853 2959,-4710 ; -3,-4679 -3,-2 -2,-1 2959,-1 2959,-4680 ; 2959,-4721 2959,-4684

## Text inside footprints (layer, text, board x,y; h text height)
C2: Top Overlay "-" at 127,-4609 h60; Top Overlay "+" at 62,-4614 h60
C15: Top Overlay "-" at 692,-3560 h60 r180
P1: Top Overlay "1" at 1646,-3019 h50 r180; Top Overlay "2" at 1646,-3119 h50 r180; Top Overlay "29" at 86,-3019 h50 r180; Top Overlay "30" at 86,-3119 h50 r180
P2: Top Overlay "2" at 1652,-958 h50 r180; Top Overlay "1" at 1652,-858 h50 r180
P3: Top Overlay "1" at 2757,-4205 h50 r90; Top Overlay "2" at 2657,-4205 h50 r90; Top Overlay "40" at 2561,-2262 h50 r90
P4: Top Overlay "1" at 578,-4184 h50 r90; Top Overlay "2" at 478,-4204 h50 r90; Top Overlay "4" at 478,-3944 h50 r90; Top Overlay "3" at 578,-3944 h50 r90
P6: Top Overlay "20" at 2661,-886 h50 r90; Top Overlay "19" at 2760,-879 h50 r90; Top Overlay "1" at 2759,-1955 h50 r90; Top Overlay "2" at 2659,-1955 h50 r90